# EAGLE board finalpcb (EAGLE 5.12)
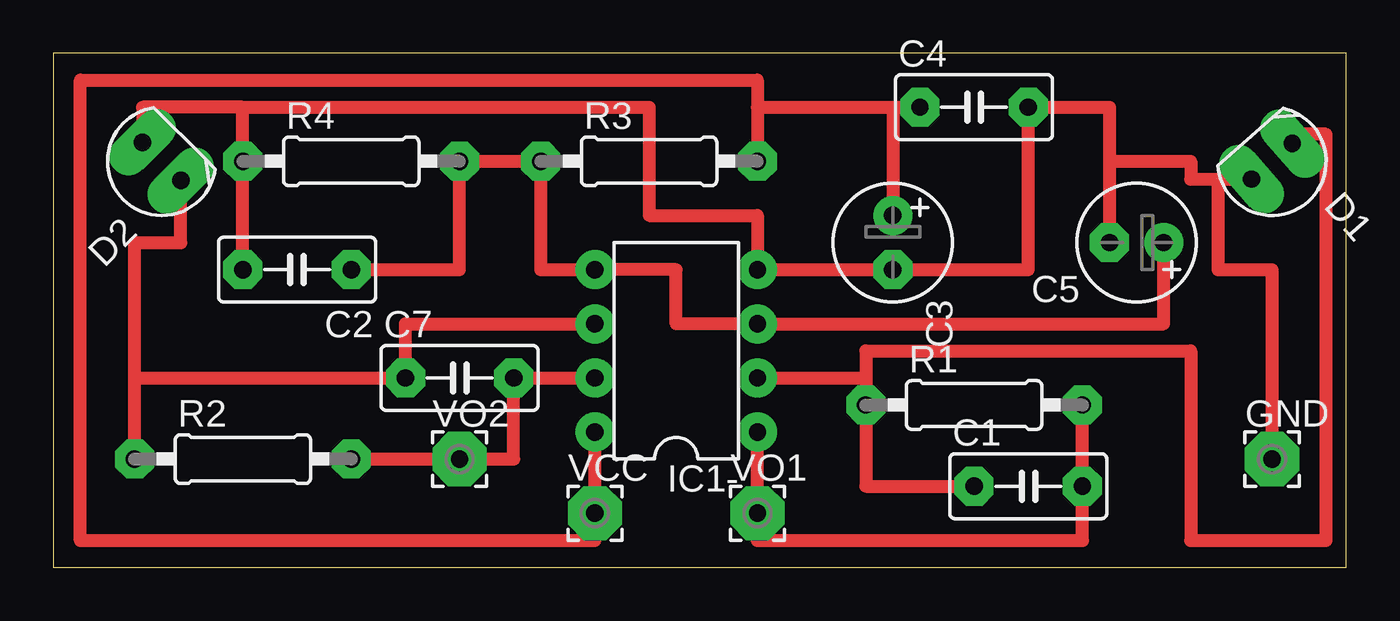
[diagram p0: board, top side]

Size 60.63 x 24.12 mm. Coordinates in mm from the lower left corner, seen from the top.
Outline: 0,0 60.63,0 60.63,24.12 0,24.12 0,0
Copper layers (1*16): Top 0.035mm / dielectric 1.5mm / Bottom 0.035mm
Design rules "LabE": minimum track width 24mil, minimum drill 0.8mm, track to track 16mil, track to pad 16mil, pad to pad 16mil, via to via 16mil, smd to smd 16mil, copper to edge 0mil, drill to drill 16mil, minimum pad ring 20mil, minimum via ring 20mil, stop-mask expansion 4mil, vias tented up to drill 0mil, thermal gap 10mil

## Footprints (pad centres in the part's own frame; a part is rotated, then mirrored left to right if it is on the bottom)
C050-030X075 = drill 0.813 octagon: 1 -2.54,0; 2 2.54,0
E2,5-6 = drill 0.813 pad 1.6 round: + -1.27,0 | drill 0.813 pad 1.6 octagon: - 1.27,0
SFH205 = drill 0.813 long: A 0,-1.27; K 0,1.27
2,54/0,8 = drill 0.813 pad 2.54 octagon: 1 0,0
DIL08 = drill 0.813 pad 1.27 round: 1 -3.81,-3.81; 2 -1.27,-3.81; 3 1.27,-3.81; 4 3.81,-3.81; 5 3.81,3.81; 6 1.27,3.81; 7 -1.27,3.81; 8 -3.81,3.81
0207/10 = drill 0.813 octagon: 1 -5.08,0; 2 5.08,0

## Placement (x,y rotation side)
C1  [C050-030X075]  45.72,3.81 0 top
C2  [C050-030X075]  11.43,13.97 180 top
C3  [E2,5-6]  39.37,15.24 270 top
C4  [C050-030X075]  43.18,21.59 0 top
C5  [E2,5-6]  50.8,15.24 180 top
C7  [C050-030X075]  19.05,8.89 0 top
D1  SFH205  [SFH205]  57.15,19.05 311.2 top
D2  SFH205  [SFH205]  5.08,19.05 225.1 top
GND  [2,54/0,8]  57.15,5.08 0 top
IC1-  MCP602P  [DIL08]  29.21,10.16 90 top
R1  [0207/10]  43.18,7.62 0 top
R2  [0207/10]  8.89,5.08 0 top
R3  [0207/10]  27.94,19.05 0 top
R4  [0207/10]  13.97,19.05 0 top
VCC  [2,54/0,8]  25.4,2.54 0 top
VO1  [2,54/0,8]  33.02,2.54 0 top
VO2  [2,54/0,8]  19.05,5.08 0 top

## Library data of the parts
C1-C5 C7 R1-R4 = rcl
D1 D2 = opto-trans-siemens; OC_FARNELL: unknown; OC_NEWARK: unknown
GND VCC VO1 VO2 = wirepad
IC1- = linear

## Nets
N$1: C1.1 D1.K IC1-.2 R1.1
N$2: C7.1 D2.K IC1-.6 R2.1
N$3: C7.2 IC1-.7 R2.2 VO2.1
N$4: C1.2 IC1-.1 R1.2 VO1.1
N$5: C2.1 C5.+ IC1-.3 IC1-.5 R3.1 R4.2
N$6: C3.+ C4.1 IC1-.8 R3.2 VCC.1
N$7: C2.2 C3.- C4.2 C5.- D1.A D2.A GND.1 IC1-.4 R4.1

## Tracks (layer width: path | path; a pad name or v marks a point on that pad's centre or on a via)
N$1
  Top 0.61: C1.1 38.1,3.81 R1.1 38.1,8.89 | IC1-.2 38.1,8.89 | D1.K 58.1,20.32 59.69,20.32 59.69,1.27 53.34,1.27 53.34,10.16 38.1,10.16 38.1,8.89
N$2
  Top 0.61: IC1-.6 16.51,11.43 C7.1 3.81,8.89 | R2.1 3.81,8.89 | 3.81,8.89 3.81,15.24 5.98,15.24 D2.K
N$3
  Top 0.61: IC1-.7 C7.2 21.59,5.08 VO2.1 R2.2
N$4
  Top 0.61: IC1-.1 VO1.1 33.02,1.27 48.26,1.27 C1.2 R1.2
N$5
  Top 0.61: C2.1 19.05,13.97 R4.2 R3.1 22.86,13.97 IC1-.5 29.21,13.97 29.21,11.43 IC1-.3 52.07,11.43 C5.+
N$6
  Top 0.61: IC1-.8 VCC.1 25.4,1.27 1.27,1.27 1.27,22.86 33.02,22.86 33.02,21.59 | 33.02,21.59 R3.2 | 33.02,21.59 39.37,21.59 | 39.37,21.59 C4.1 | 39.37,21.59 C3.+
N$7
  Top 0.61: GND.1 57.15,13.97 54.61,13.97 54.61,18.21 | 49.53,19.05 49.53,21.59 C4.2 45.72,13.97 C3.- IC1-.4 33.02,16.51 27.94,16.51 27.94,21.59 8.89,21.59 | 49.53,19.05 C5.- | 8.89,21.59 R4.1 C2.2 | 8.89,21.59 4.18,21.59 D2.A | 54.61,18.21 53.34,18.21 53.34,19.05 49.53,19.05 | 54.61,18.21 D1.A